# Altium PCB LoadCell_Amp_PCB.PcbDoc
Units mm, origin at the board's own origin, x right, y up, seen from the top; angles counter-clockwise.
Board outline 50 x 49.97 mm, 2 copper layers (Top Layer, Bottom Layer); 14 components, 24 nets, 69 pads, 7 vias.
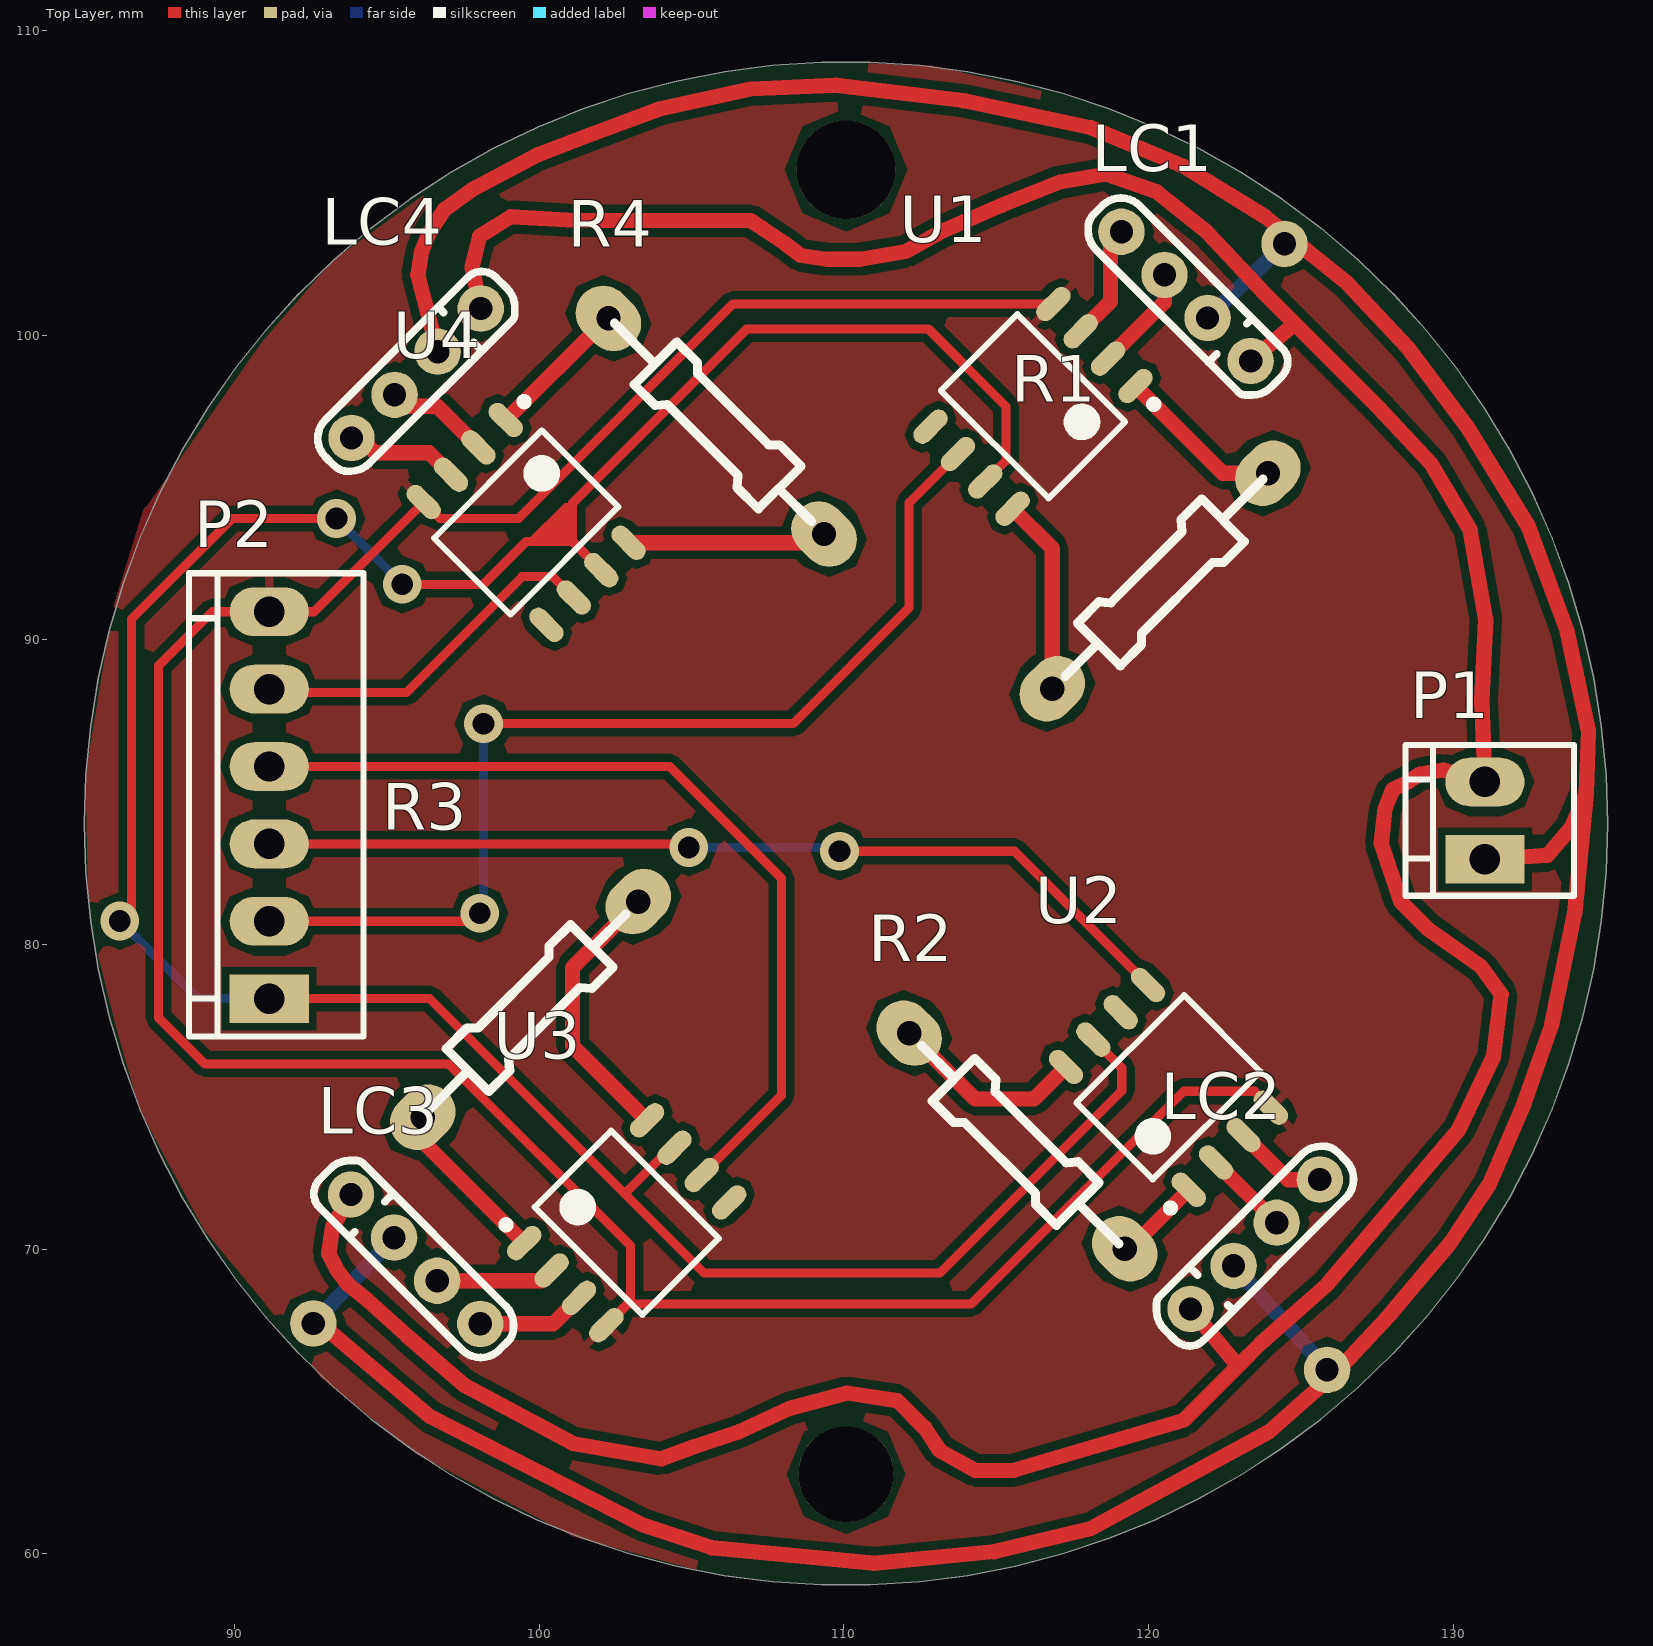
[diagram p0: Top Layer view]
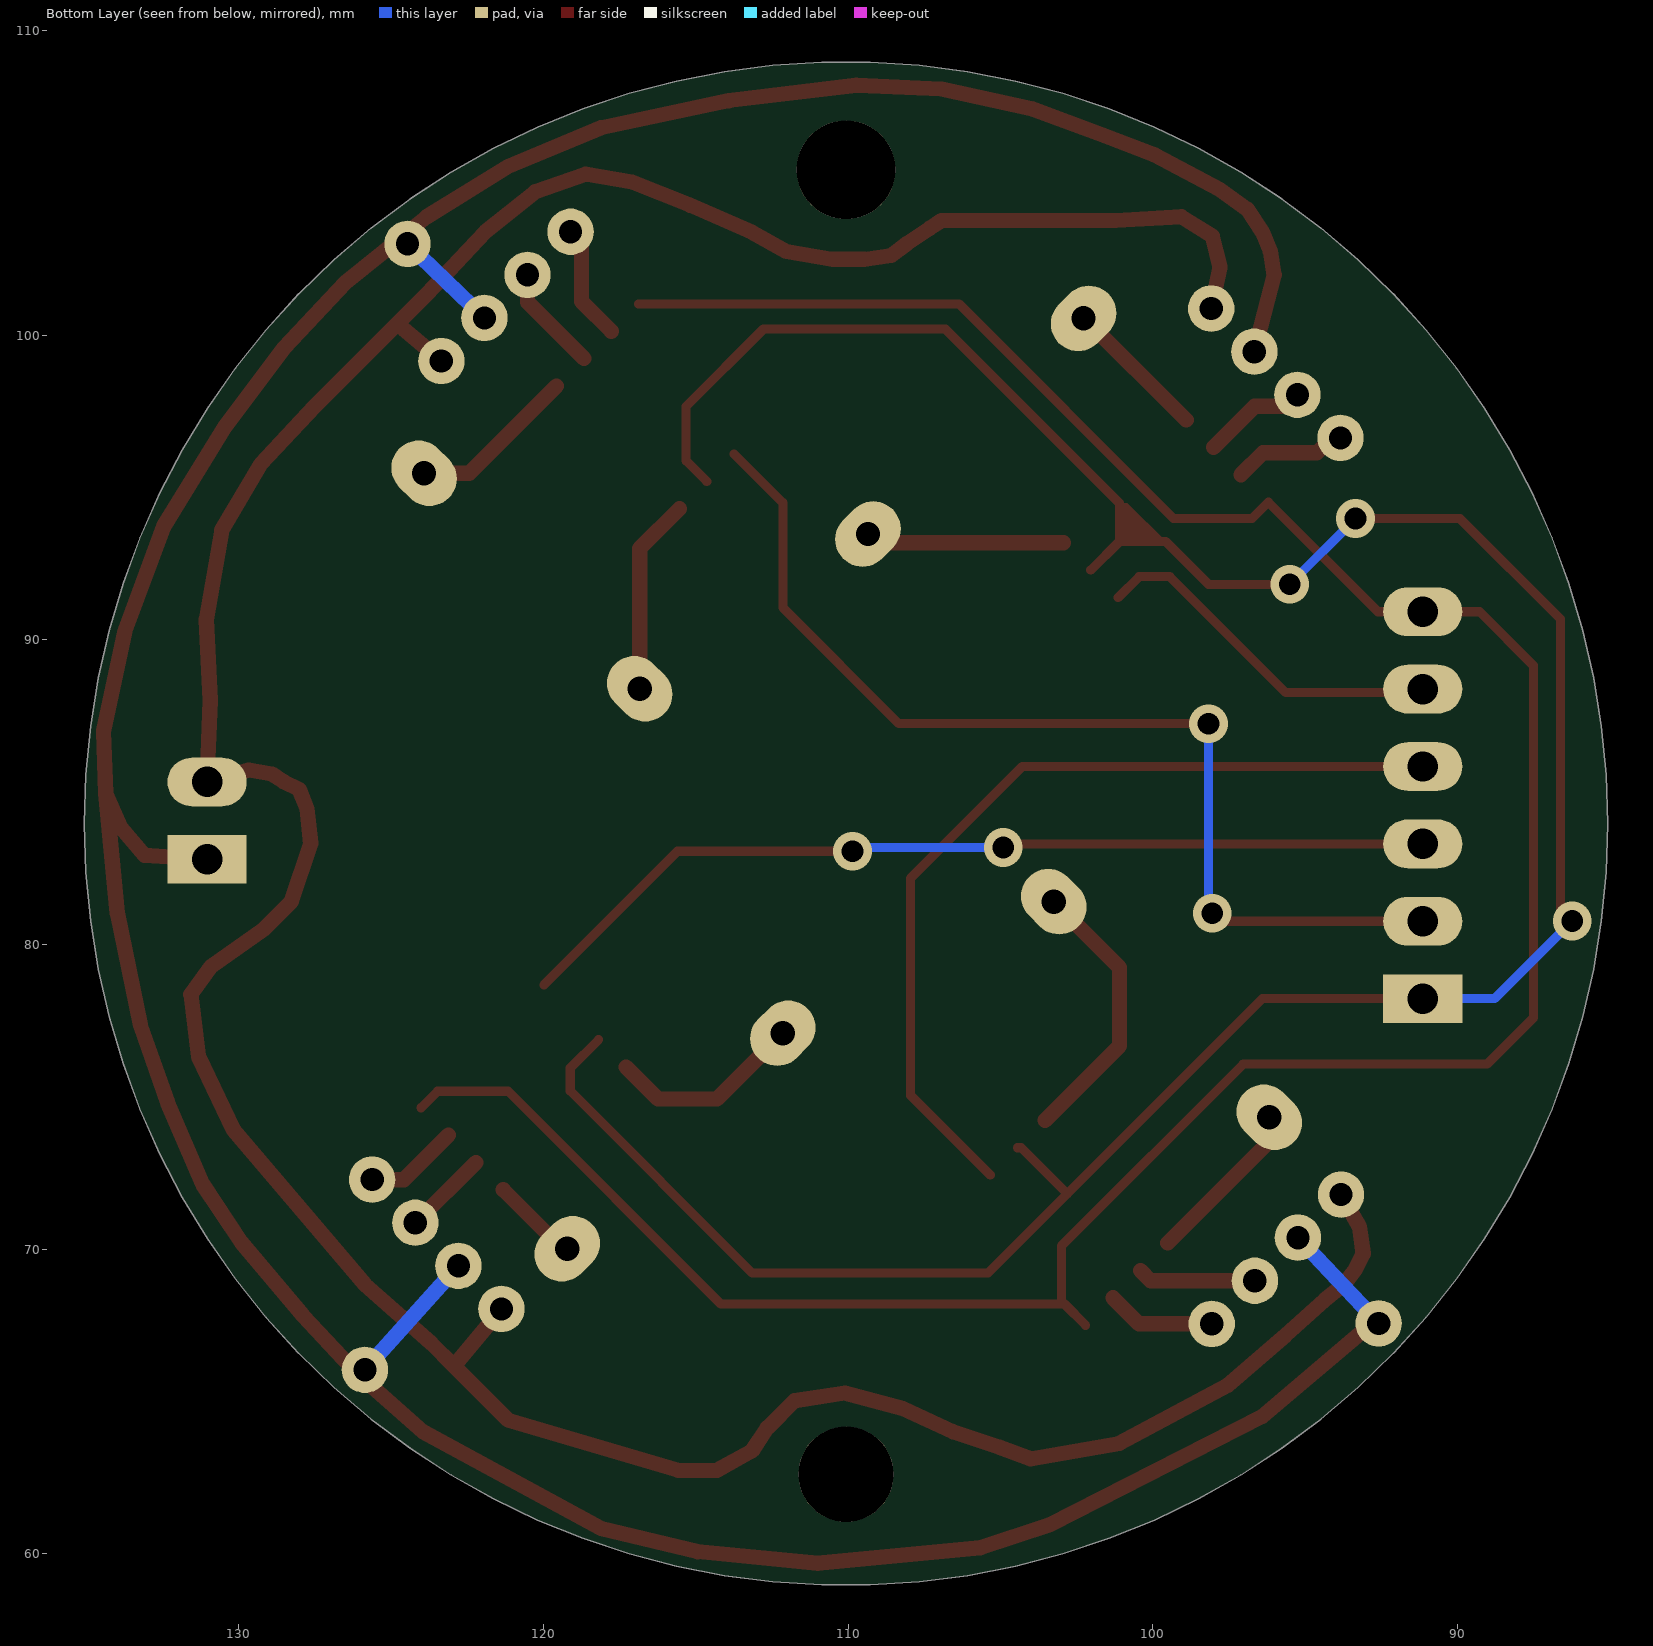
[diagram p1: Bottom Layer view, seen from below]

## Layer stack, top to bottom
Top Solder: solder mask 0.0102, Solder Resist, Dk 3.5
Top Layer: signal copper 0.0356
Dielectric 1: dielectric 0.32, FR-4, Dk 4.8
Bottom Layer: signal copper 0.0356
Bottom Solder: solder mask 0.0102, Solder Resist, Dk 3.5

## Board outline
85.068,83.967 85.119,82.366 85.273,80.77 85.529,79.188 85.885,77.626 86.341,76.09 86.895,74.586 87.543,73.12 88.285,71.699 89.115,70.329 90.032,69.015 91.032,67.762 92.109,66.575 93.26,65.46 94.48,64.422 95.765,63.463 97.108,62.589 98.504,61.802 99.948,61.107 101.434,60.506 102.954,60.001 104.505,59.594 106.078,59.288 107.667,59.083 109.266,58.98 110.869,58.98 112.468,59.083 114.058,59.288 115.631,59.594 117.181,60.001 118.702,60.506 120.187,61.107 121.631,61.802 123.027,62.589 124.371,63.463 125.655,64.422 126.875,65.46 128.026,66.575 129.104,67.762 130.103,69.015 131.02,70.329 131.851,71.699 132.592,73.12 133.241,74.586 133.794,76.09 134.25,77.626 134.607,79.188 134.862,80.77 135.016,82.366 135.068,83.967 135.016,85.569 134.862,87.164 134.607,88.746 134.25,90.309 133.794,91.845 133.241,93.349 132.592,94.815 131.851,96.235 131.02,97.606 130.103,98.92 129.104,100.173 128.026,101.359 126.875,102.474 125.655,103.513 124.371,104.472 123.027,105.346 121.631,106.132 120.187,106.828 118.702,107.429 117.181,107.934 115.631,108.341 114.058,108.647 112.468,108.852 110.869,108.955 109.266,108.955 107.667,108.852 106.078,108.647 104.505,108.341 102.954,107.934 101.434,107.429 99.948,106.828 98.504,106.132 97.108,105.346 95.765,104.472 94.48,103.513 93.26,102.474 92.109,101.359 91.032,100.173 90.032,98.92 89.115,97.606 88.285,96.235 87.543,94.815 86.895,93.349 86.341,91.845 85.885,90.309 85.529,88.746 85.273,87.164 85.119,85.569

## Design rules (kind name [scope] priority, off if disabled: settings)
Clearance [All] p1: gap=0.254
PolygonConnect [All] p1: connectstyle=Relief reliefconductorwidth=0.254 reliefentries=4 polygonreliefangle="90 Angle" airgapwidth=0.254
RoutingVias [All] p1: holewidth=0.711 width=1.27 viastyle="Through Hole" minholewidth=0.711 minwidth=1.27 maxholewidth=0.711 maxwidth=1.27
SolderMaskExpansion [All] p1: expansion=0.102
Width [All] p1: maxlimit=1 minlimit=0.3 preferedwidth=0.8
29 further rules are at their usual default settings.

## Components (designator, comment, footprint, x,y, rotation, side; value= is the part's Value field where it differs from the comment)
LC1 "LoadCell-SUP" LoadCell-SUP 121.158,102.616 r135 top
LC2 "LoadCell-SUP" LoadCell-SUP 124.841,70.231 r45 top
LC3 "LoadCell-SUP" LoadCell-SUP 96.012,68.326 r315 top
LC4 "LoadCell-SUP" LoadCell-SUP 94.615,98.679 r225 top
P1 "LHWR" "Polarized Header 2" 130.81,84.074 r90 top
P2 "LHWR" "Polarized Header 6" 90.932,84.582 r90 top
R1 "RES" AXIAL0.4 116.84,88.392 r45 top
R2 "RES" AXIAL0.4 112.141,77.089 r315 top
R3 "RES" AXIAL0.4 103.251,81.407 r225 top
R4 "RES" AXIAL0.4 109.347,93.472 r135 top
U1 "*AD604" AD620-Soic 116.205,97.663 r225 top
U2 "*AD604" AD620-Soic 120.65,75.311 r135 top
U3 "*AD604" AD620-Soic 102.87,70.866 r45 top
U4 "*AD604" AD620-Soic 99.568,93.853 r315 top

## Footprints (in the part's own frame and the unit in brackets; to place one, negate y for a bottom-side part, rotate by r counter-clockwise, add the part's x,y. Pads: shape width x height; smd on the part's side, far side on the other; paste and mask are expansions set on the pad)
AD620-Soic [mm] "SOIC, 8-Leads, Body 4.90x3.90mm, Pitch 1.27mm, IPC Medium Density"
  oval 1.35x0.6 smd: 1(-2.85,1.905) 2(-2.85,0.635) 3(-2.85,-0.635) 4(-2.85,-1.905) 5(2.85,-1.905) 6(2.85,-0.635) 7(2.85,0.635) 8(2.85,1.905)
  silkscreen extent -2.97,-2.5 1.77,2.88, body extent -2,-2.5 2,2.5, height 1.75
AXIAL0.4 [mm]
  oval 2.3x1.8 hole 0.8: 1(0,0) 2(10.008,0)
  silkscreen extent 0.58,-1.04 9.75,0.94
LoadCell-SUP [mil]
  round 60 hole 30: 1(-157.48,35.43) 2(-78.74,35.43) 3(0,35.43) 4(78.74,35.43)
  silkscreen extent -200,-5 120,75
"Polarized Header 2" [mm]
  rect 1.6x2.6 hole 1: 1(-1.28,-0.23)
  oval 1.6x2.6 hole 1: 2(1.26,-0.23)
  silkscreen extent -2.47,-3.15 2.48,2.37, body extent -2.57,-3.43 2.51,2.37, height 10.75
"Polarized Header 6" [mm]
  rect 1.6x2.6 hole 1: 1(-6.36,-0.205)
  oval 1.6x2.6 hole 1: 2(-3.82,-0.205) 3(-1.28,-0.205) 4(1.26,-0.205) 5(3.8,-0.205) 6(6.34,-0.205)
  silkscreen extent -7.6,-3.3 7.6,2.42, body extent -7.62,-3.32 7.62,2.48, height 10.75

## Part data
P1: library part "2pin LHWR"
P2: library part "6pin LHWR"
U1 U2 U3 U4: library part AD620, "Instrumental Amplifire"

## Free pads (board coordinates)
  round 3.122 hole 3.122: 1(110.068,62.612)
  round 3.24 hole 3.24: 1(110.068,105.428)
  round 1.524 hole 0.762: 4(124.46,102.997) 5(92.583,67.564) 6(125.857,66.04)

## Via types
v1: diameter 1.27, hole 0.711, Top Layer to Bottom Layer, 7 vias

## Nets (pads, with @x,y where several pads share a name; then routed paths per layer and width w, separated by ;. In a path a pad name is that pad's centre, name@x,y a point inside that pad or via, vN(x,y) a via of type N, cw(c..) or ccw(c..) an arc to the next point about the centre after c; other vN are vias at no path point)
GND: P2.6 U1.4 U2.4 U3.4 U4.4 | length 93
  Top Layer w0.3: U1.4 106.359,101.025 99.314,93.98 96.747,93.98 U4.4 92.606,90.922 P2.6 89.271,90.922 87.503,89.154 87.503,77.597 89.027,76.073 97.028,76.073 102.997,70.104 102.997,68.299 U3.4 102.897,68.199 114.173,68.199 121.158,75.184 123.471,75.184 U2.4
NetLC1_1: LC1.1 LC2.1 LC3.1 LC4.1 P1.2 | length 117
  Top Layer w0.5: LC3.1 93.218,70.739 93.091,69.85 93.345,69.342 93.726,68.834 94.361,68.326 95.631,67.183 97.536,65.532 101.092,63.627 104.013,63.119 105.029,63.5 106.553,64.008 108.204,64.77 110.109,65.278 111.76,65.024 112.649,64.135 113.157,63.373 114.3,62.738 115.57,62.738 121.158,64.389 122.936,66.167 ; LC4.1 97.79,102.235 98.044,103.251 99.06,103.886 101.219,103.759 106.934,103.759 107.315,103.505 108.077,102.997 108.585,102.616 109.474,102.489 110.49,102.489 112.014,102.743 113.157,103.378 115.189,104.267 117.094,105.029 118.618,105.283 120.269,104.706 121.92,103.378 123.825,101.346 127.508,97.663 129.286,95.758 130.556,93.599 131.064,90.678 130.937,88.011 P1.2 129.667,85.725 128.905,85.598 128.524,85.344 128.016,85.09 127.762,84.455 127.635,83.312 128.27,81.407 129.159,80.518 130.937,79.248 131.572,78.359 131.318,76.327 130.175,73.914 125.857,68.834 123.698,66.929 122.936,66.167 ; LC2.1 122.936,66.167 ; LC1.1 124.587,100.203
NetLC1_2: LC1.2 LC2.2 LC3.2 LC4.2 P1.1 pad.4 pad.5 pad.6 | length 131.5
  Top Layer w0.5: pad.5@92.456,67.945 93.091,67.31 96.393,64.516 103.378,60.96 105.664,60.198 110.998,59.69 114.935,60.071 118.11,60.833 123.952,64.008 126.031,65.843 126.111,65.913 127.889,67.818 129.921,70.231 131.191,72.136 132.334,74.803 133.223,77.343 133.985,81.026 134.366,84.963 ; LC4.2 96.012,101.981 96.139,102.743 96.393,103.378 96.901,104.14 97.79,104.775 99.949,105.918 101.6,106.553 104.013,107.442 106.934,108.077 109.728,108.204 113.919,107.696 118.11,106.807 121.158,105.537 123.825,103.886 124.643,103.224 126.492,101.727 128.524,99.568 130.429,97.028 132.461,93.726 133.731,90.297 134.439,86.995 134.366,84.963 ; P1.1 133.096,82.931 133.858,83.82 134.366,84.963
  Bottom Layer w0.5: pad.5 LC3.2 ; LC1.2 pad.4 ; LC2.2 pad.6
NetLC1_3: LC1.3 U1.2 | length 3.5
  Top Layer w0.5: U1.2 120.522,101.082 LC1.3
NetLC1_4: LC1.4 U1.3 | length 3.8
  Top Layer w0.5: U1.3 118.745,101.101 118.745,103.031 LC1.4
NetLC2_3: LC2.3 U2.2 | length 2.8
  Top Layer w0.5: U2.2 124.196,70.867 LC2.3
NetLC2_4: LC2.4 U2.3 | length 3.1
  Top Layer w0.5: U2.3 124.577,72.282 LC2.4
NetLC3_3: LC3.3 U3.2 | length 3.9
  Top Layer w0.5: LC3.3 100.068,68.962 U3.2
NetLC3_4: LC3.4 U3.3 | length 3.6
  Top Layer w0.5: LC3.4 100.45,67.548 U3.3
NetLC4_3: LC4.3 U4.2 | length 3.5
  Top Layer w0.5: LC4.3 95.631,97.663 96.656,97.663 U4.2
NetLC4_4: LC4.4 U4.3 | length 3.8
  Top Layer w0.5: LC4.4 94.126,96.628 94.615,96.139 96.384,96.139 U4.3
NetR1_1: R1.1 U1.8 | length 6.4
  Top Layer w0.5: U1.8 116.84,92.997 R1.1
NetR1_2: R1.2 U1.1 | length 5.5
  Top Layer w0.5: U1.1 122.43,95.469 R1.2
NetR2_1: R2.1 U2.8 | length 6.5
  Top Layer w0.5: R2.1 114.3,74.93 116.238,74.93 U2.8
NetR2_2: R2.2 U2.1 | length 2.9
  Top Layer w0.5: R2.2 119.382,70.012 U2.1
NetR3_1: R3.1 U3.8 | length 9.1
  Top Layer w0.5: R3.1 101.092,79.248 101.092,76.675 U3.8
NetR3_2: R3.2 U3.1 | length 5.5
  Top Layer w0.5: R3.2 96.174,73.531 U3.1
NetR4_1: R4.1 U4.8 | length 6.5
  Top Layer w0.5: U4.8 R4.1@109.06,93.185
  Top Layer w0.8: R4.1@109.06,93.185 R4.1
NetR4_2: R4.2 U4.1 | length 4.7
  Top Layer w0.5: U4.1 R4.2@102.233,100.549
OUT1: P2.2 U1.6 | length 34.6
  Top Layer w0.3: P2.2 97.78,80.762 v1(98.044,81.026) ; v1(98.171,87.249) 108.331,87.249 112.141,91.059 112.141,94.497 U1.6
  Bottom Layer w0.3: v1(98.044,81.026) 98.171,81.026 v1(98.171,87.249)
OUT2: P2.3 U2.5 | length 30.8
  Top Layer w0.3: P2.3 104.785,83.302 v1(104.902,83.185) ; v1(109.855,83.058) 115.597,83.058 U2.5
  Bottom Layer w0.3: v1(104.902,83.185) 109.728,83.185 v1(109.855,83.058)
OUT3: P2.4 U3.6 | length 29.2
  Top Layer w0.3: P2.4 104.277,85.842 107.95,82.169 107.95,75.048 U3.6
OUT4: P2.5 U4.6 | length 11.9
  Top Layer w0.3: P2.5 91.254,88.265 95.631,88.265 99.441,92.075 100.448,92.075 U4.6
VCC: P2.1 U1.7 U2.7 U3.7 U4.7 | length 94.8
  Top Layer w0.3: v1(86.233,80.772) 86.614,81.153 86.614,90.678 89.916,93.98 v1(93.345,93.98) ; P2.1 96.403,78.222 102.806,71.819 ; v1(95.504,91.821) 98.171,91.821 99.577,93.227 101.092,93.227 ; U4.7 101.092,93.227 ; U3.7 104.318,73.33 102.806,71.819 ; U1.7 115.316,95.876 115.316,97.663 112.776,100.203 106.807,100.203 101.092,94.488 101.092,93.227 ; U2.7 119.117,75.946 119.117,75.193 113.139,69.215 105.41,69.215 102.806,71.819
  Bottom Layer w0.3: v1(86.233,80.772) 88.783,78.222 P2.1 ; v1(93.345,93.98) v1(95.504,91.821)
pads on no net: U1.5 U2.6 U3.5 U4.5

## Polygon pours and split planes (outlines as drawn)
GND on Top Layer "Mechanical 1-No Net" (solid, pour order 2): 87.122,94.361 89.574,98.263 93.26,102.474 97.806,105.739 100.691,107.128 103.505,108.077 106.078,108.647 110.068,108.955 112.903,108.839 117.941,107.682 119.761,106.934 120.909,106.48 121.793,106.045 123.952,104.775 126.265,102.994 128.905,100.33 131.851,96.235 133.477,92.837 134.493,89.281 135.001,87.503 135.128,85.344 134.735,79.979 133.604,75.692 132.221,72.41 131.191,70.612 128.27,66.802 126.619,65.151 124.079,63.373 117.729,60.198 113.263,59.185 107.442,59.182 105.291,59.441 101.092,60.579 96.012,63.246 92.837,65.786 90.932,68.326 89.027,70.612 86.895,74.586 86.106,77.343 85.471,79.883 85.196,81.568 85.119,85.569 85.979,90.932 86.995,94.234 88.392,96.52 90.932,99.822

## Other copper
Top Layer:
  region net VCC: 101.092,94.488 100.838,94.488 99.577,93.227 101.092,93.227

## Silkscreen, mask and mechanical layers (free items; w line width, h text height)
Mechanical 1:
  lines w0.254: 85.068,83.967 85.09,85.979 85.344,87.757 86.868,93.853 87.63,95.25 88.7,96.921 91.694,100.838 93.091,102.362 94.742,103.632 98.044,105.918 101.981,107.569 105.664,108.585 108.077,108.839 111.669,108.903 114.427,108.585 116.84,108.077 119.445,107.128 122.329,105.739 125.655,103.513 128.27,101.219 130.048,99.06 132.461,95.25 133.223,93.853 133.731,92.329 133.985,91.44 135.001,87.376 135.128,85.471 135.128,83.566 135.001,81.788 134.022,76.858 132.916,73.853 131.699,71.501 128.565,67.169 126.875,65.46 124.587,63.627 120.777,61.341 116.406,59.797 114.3,59.309 111.669,59.032 108.839,59.055 106.872,59.185 104.505,59.594 100.691,60.806 98.806,61.595 96.139,63.246 93.26,65.46 90.032,69.015 88.285,71.699 86.341,76.09 85.725,78.867 85.273,80.77 85.068,83.967